# Altium PCB FENCE_MONITOR.PcbDoc (part 1 of 2)
Units mm, origin at the board's own origin, x right, y up, seen from the top; angles counter-clockwise.
Board outline 22.8 x 52 mm, 2 copper layers (Top Layer, Bottom Layer), stack 1.579 mm thick; 78 components, 46 nets, 180 pads, 62 vias.
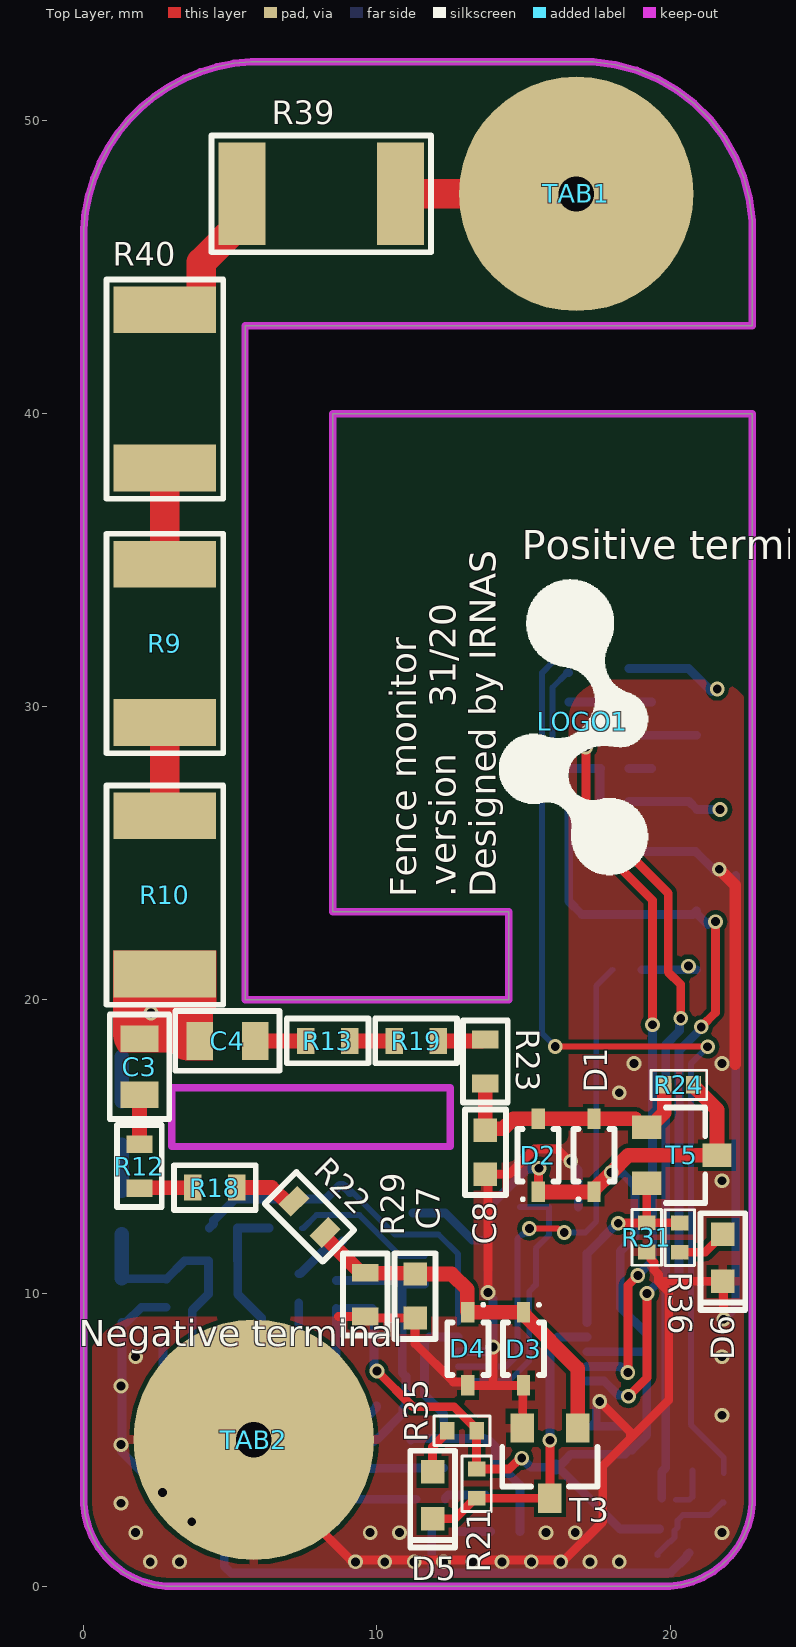
[diagram p0: Top Layer view]
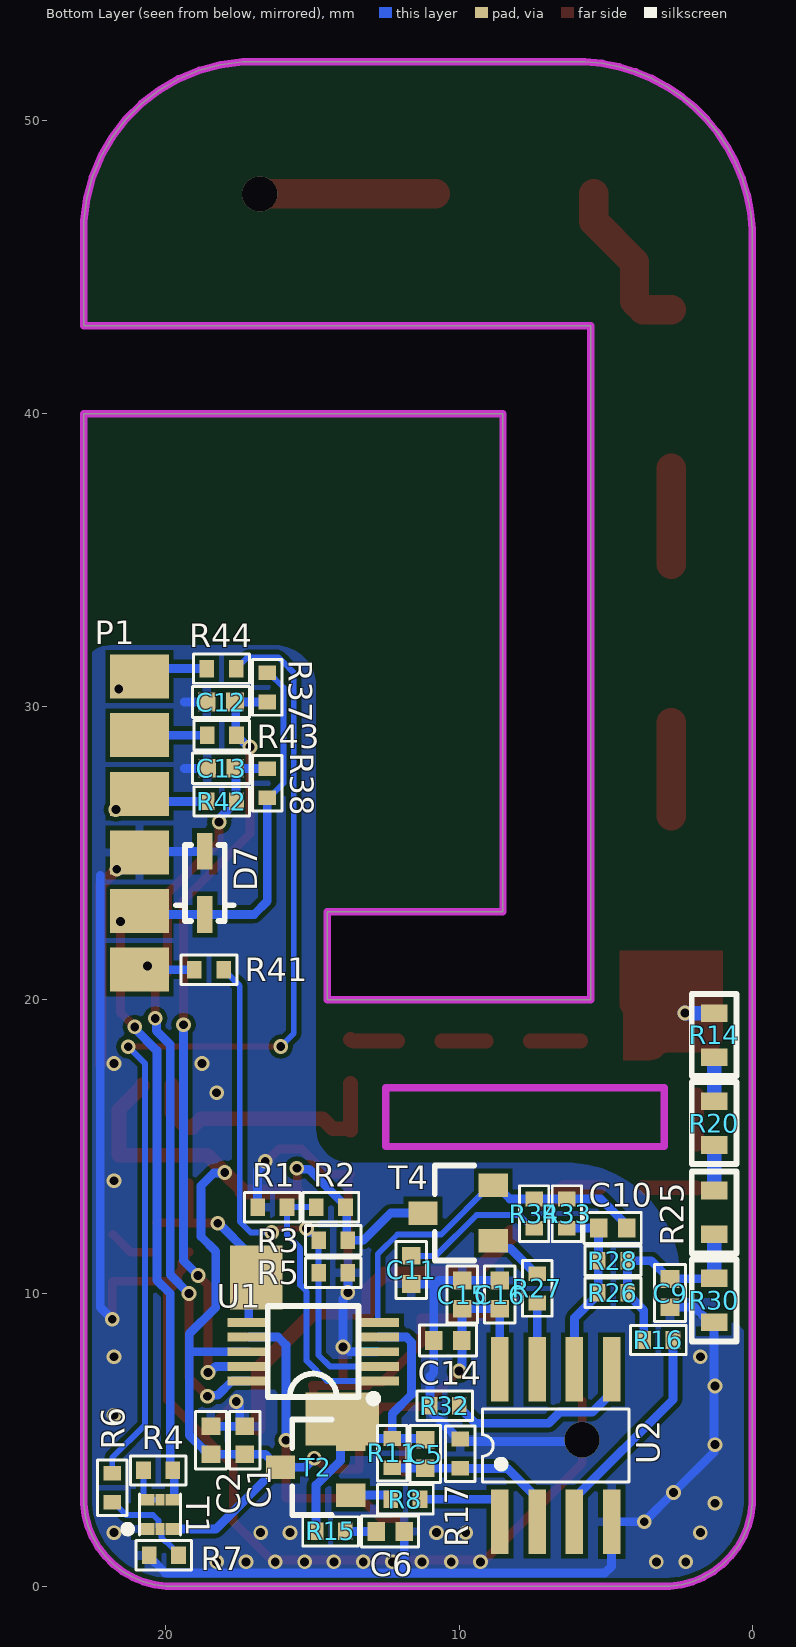
[diagram p1: Bottom Layer view, seen from below]

## Layer stack, top to bottom
Top Solder: solder mask 0.0102, Solder Resist, Dk 3.5
Top Layer: signal copper 0.0356
Dielectric 1: dielectric 1.508, FR-4, Dk 4.8
Bottom Layer: signal copper 0.0356
Bottom Solder: solder mask 0.0102, Solder Resist, Dk 3.5

## Board outline
0.303,1.671 0.153,2.034 0.051,2.414 0,2.804 0,3 0,17.6 0,18.6 0,46 0,46.295 0.058,46.881 0.173,47.459 0.344,48.024 0.569,48.568 0.847,49.088 1.175,49.578 1.549,50.034 1.966,50.451 2.421,50.825 2.912,51.153 3.431,51.43 3.976,51.656 4.54,51.827 5.118,51.942 5.705,52 6,52 17,52 17.38,52 18.134,51.901 18.868,51.704 19.571,51.413 20.229,51.033 20.832,50.57 21.37,50.033 21.832,49.429 22.213,48.771 22.504,48.069 22.7,47.334 22.8,46.581 22.8,43 5.5,43 5.5,20 14.5,20 14.5,23 8.5,23 8.5,40 22.8,40 22.8,30.5 22.8,22.5 22.8,18.6 22.8,17.6 22.8,3.002 22.8,2.805 22.749,2.415 22.647,2.035 22.496,1.671 22.3,1.331 22.06,1.018 21.782,0.74 21.47,0.501 21.129,0.304 20.765,0.153 20.385,0.052 19.995,0 19.799,0 3,0 2.803,0 2.413,0.052 2.033,0.153 1.67,0.304 1.329,0.5 1.017,0.74 0.739,1.018 0.5,1.33

## Design rules (kind name [scope] priority, off if disabled: settings)
Clearance Clearance_ANT [InComponent('A1')] p1 off: gap=2.24 ignorepadtopadclearanceinfootprint=TRUE
Clearance [All] p2: gap=0.152 ignorepadtopadclearanceinfootprint=FALSE
ComponentClearance [All] p1: gap=0.152 collisioncheckmode=3 verticalgap=0.152 showdistances=FALSE
MinimumSolderMaskSliver [All] p1: minsoldermaskwidth=0
PlaneClearance [InComponent('A1')] p1: clearance=0.508
PolygonConnect [All] p1: thpad.connectstyle=Direct thpad.reliefconductorwidth=0.254 thpad.reliefentries=4 thpad.polygonreliefangle="90 Angle" thpad.airgapwidth=0.254 smdpad.connectstyle=Relief smdpad.reliefconductorwidth=0.3 smdpad.reliefentries=4 smdpad.polygonreliefangle="90 Angle" smdpad.airgapwidth=0.157 via.connectstyle=Direct via.reliefconductorwidth=0.254 via.reliefentries=4 via.polygonreliefangle="90 Angle" via.airgapwidth=0.254
RoutingVias [All] p1: holewidth=0.2 width=0.4 viastyle="Through Hole" minholewidth=0.2 minwidth=0.4 maxholewidth=1.5 maxwidth=2
SilkToSilkClearance [All] p1: silktosilkclearance=0
SilkToSolderMaskClearance [IsPad] p1: minsilkscreentomaskgap=0 clearancetoexposedcopper=TRUE
SolderMaskExpansion [All] p1: expansion=0.102 istentingtop=FALSE
Width [All] p1: maxlimit=5 minlimit=0.127 preferedwidth=0.3
25 further rules are at their usual default settings.

## Classes and differential pairs
component class ANALOG: C3 C4 C5 C6 C7 C8 C9 C10 C11 C14 C15 C16 D1 D2 D3 D4 D5 D6 R8 R9 R10 R11 R12 R13 R14 R15 R16 R17 R18 R19 R20 R21 R22 R23 R24 R25 R26 R27 R28 R29 R30 R31 R32 R33 R34 R35 R36 R39 R40 T2 T3 T4 T5 TAB1 TAB2 U2
component class ADC: C1 C2 R1 R2 R3 R4 R5 R6 R7 T1 U1
component class MAIN: C12 C13 D7 LOGO1 P1 R37 R38 R41 R42 R43 R44

## Components (designator, comment, footprint, x,y, rotation, side; value= is the part's Value field where it differs from the comment)
C1 "1uF" CAP0402 17.31,4.98 r270 bottom
C2 "100nF" CAP0402 18.46,4.98 r270 bottom
C3 "1nF" CAP0805 1.9,17.72 r90 top
C4 "1nF" CAP0805 4.9,18.6 r180 top
C5 "1pF" CAP0402 11.15,4.51 r90 bottom
C6 "100nF" CAP0402 12.35,1.87 r0 bottom
C7 "4.7pF" CAP0603 11.3,9.9 r90 top
C8 "4.7pF" CAP0603 13.7,14.8 r90 top
C9 "1pF" CAP0402 2.8,10 r90 bottom
C10 "1pF" CAP0402 4.76,12.22 r180 bottom
C11 "100nF" CAP0402 11.63,10.79 r90 bottom
C12 "100pF" CAP0402 18.12,30.16 r180 bottom
C13 "100pF" CAP0402 18.11,27.9 r180 bottom
C14 "1nF" CAP0402 10.38,8.38 r180 bottom
C15 "10nF" CAP0402 9.89,9.95 r270 bottom
C16 "100nF" CAP0402 8.61,9.95 r270 bottom
D1 "BAT54HT1G" "SOD-323 2L" 17.4,14.7 r90 top
D2 "BAT54HT1G" "SOD-323 2L" 15.5,14.7 r90 top
D3 "BAT54HT1G" "SOD-323 2L" 15,8.1 r270 top
D4 "BAT54HT1G" "SOD-323 2L" 13.1,8.1 r270 top
D5 "LED RED" LED0603 11.9,3.1 r90 top
D6 "LED RED" LED0603 21.8,11.2 r90 top
D7 "uClamp3301D" SOD-323 18.67,23.99 r0 bottom
LOGO1 "IRNAS logo1-10mm" LOGO_1-10MM 17,29.5 r90 top
P1 "IRNAS - LION_EXTENSION" IRNAL_LION_ADDON 20.9,26.03 r90 bottom locked
R1 "0R" RES0402 16.37,12.93 r0 bottom
R2 "0R" RES0402 14.37,12.93 r180 bottom
R3 "100k" RES0402 14.29,11.8 r180 bottom
R4 "100k" RES0402 20.26,3.95 r180 bottom
R5 "100k" RES0402 14.29,10.69 r0 bottom
R6 "100R" RES0402 21.83,3.36 r270 bottom
R7 "1M/0402" RES0402 20.07,1.059 r180 bottom
R8 "10R" RES0402 11.83,2.97 r0 bottom
R9 "1M" RES2512 2.762,32.16 r270 top
R10 "1M" RES2512 2.762,23.58 r270 top
R11 "47k" RES0402 12.28,4.54 r270 bottom
R12 "100k" RES0603 1.9,14.33 r90 top
R13 "100k" RES0603 8.32,18.6 r180 top
R14 "11k?" RES0603 1.3,18.8 r90 bottom
R15 "2R2" RES0402 14.38,1.87 r0 bottom
R16 "22k" RES0402 3.2,8.4 r180 bottom
R17 "47k" RES0402 9.96,4.52 r270 bottom
R18 "100k" RES0603 4.47,13.6 r180 top
R19 "100k" RES0603 11.34,18.6 r180 top
R20 "11k?" RES0603 1.3,15.8 r90 bottom
R21 "100k" RES0402 13.4,3.5 r90 top
R22 "100k" RES0603 7.7,12.6 r135 top
R23 "100k" RES0603 13.7,17.9 r90 top
R24 "220k" RES0402 20.3,17.1 r0 top
R25 "11k?" RES0603 1.3,12.75 r90 bottom
R26 "47k" RES0402 4.75,10.01 r180 bottom
R27 "10R" RES0402 7.33,10.16 r90 bottom
R28 "47k" RES0402 4.75,11.1 r180 bottom
R29 "220k" RES0603 9.6,9.95 r90 top
R30 "150R" RES0603 1.3,9.75 r90 bottom
R31 "100k" RES0402 19.2,11.9 r90 top
R32 "22k" RES0402 10.49,6.16 r180 bottom
R33 "47k" RES0402 6.32,12.71 r270 bottom
R34 "2R2" RES0402 7.44,12.71 r90 bottom
R35 "100R" RES0402 12.9,5.3 r0 top
R36 "100R" RES0402 20.329,11.891 r90 top
R37 "4k7" RES0402 16.54,30.66 r90 bottom
R38 "4k7" RES0402 16.54,27.39 r270 bottom
R39 "1M" RES2512 8.1,47.5 r180 top
R40 "1M" RES2512 2.762,40.84 r270 top
R41 "100R" RES0402 18.53,21.03 r180 bottom
R42 "47R" RES0402 18.09,26.77 r180 bottom
R43 "47R" RES0402 18.09,29.03 r180 bottom
R44 "100R" RES0402 18.1,31.3 r180 bottom
T1 "VT6M1T2CR" VMT6 20.2,2.45 r180 bottom value=BSS123
T2 "BC847B" "SOT 23" 14.89,4.06 r90 bottom value=BSS123
T3 "BC847B" "SOT 23" 15.9,4.2 r180 top value=BSS123
T4 "BC847B" "SOT 23" 10.03,12.73 r90 bottom value=BSS123
T5 "BC847B" "SOT 23" 20.4,14.7 r270 top value=BSS123
TAB1 "WP-SMBU SMD" WP-SMBU#1 16.8,47.49 r180 top
TAB2 "WP-SMBU SMD" WP-SMBU#2 5.8,5 r180 top
U1 "ADS1015IDGST" VSSOP-10 14.97,8 r90 bottom
U2 "TLV9052IDR" "SOIC-8 REFLOW" 6.7,4.8 r180 bottom

## Footprints (in the part's own frame and the unit in brackets; to place one, negate y for a bottom-side part, rotate by r counter-clockwise, add the part's x,y. Pads: shape width x height; smd on the part's side, far side on the other; paste and mask are expansions set on the pad)
CAP0402 [mm] "Chip Capacitor, 2-Leads, Body 1.00x0.50mm, IPC Medium Density"
  rect 0.6x0.64 smd: 1(-0.48,0) 2(0.48,0)
  silkscreen extent -0.97,-0.53 0.97,0.53, body extent -0.55,-0.3 0.55,0.3, height 0.45
CAP0603 [mm]
  rect 0.8x0.8 smd: 1(-0.75,0) 2(0.75,0)
  silkscreen extent -1.46,-0.7 1.46,0.7, body extent -0.8,-0.4 0.8,0.4, height 0.9
CAP0805 [mm]
  rect 0.9x1.3 smd: 1(-0.95,0) 2(0.95,0)
  silkscreen extent -1.78,-1.02 1.78,1.02, body extent -1,-0.6 1,0.6, height 1.5
IRNAL_LION_ADDON [mm]
  rect 1.5x2 smd: 1(-5,0) 2(-3,0) 3(-1,0) 4(1,0) 5(3,0) 6(5,0)
LED0603 [mm]
  rect 0.8x0.8 smd: 1(-0.8,0) 2(0.8,0)
  silkscreen extent -1.78,-0.76 1.52,0.76, body extent -0.85,-0.4 0.85,0.4, height 0.66
LOGO_1-10MM [mm]
  silkscreen extent -5.24,-2.25 4.85,2.83
RES0402 [mm] "Chip Resistor, 2-Leads, Body 1.00x0.50mm, IPC Medium Density"
  rect 0.5x0.6 smd: 1(-0.5,0) 2(0.5,0)
  silkscreen extent -0.95,-0.5 0.95,0.5, body extent -0.5,-0.25 0.5,0.25, height 0.35
RES0603 [mm]
  rect 0.6x0.9 smd: 1(-0.75,0) 2(0.75,0)
  silkscreen extent -1.4,-0.76 1.4,0.76, body extent -0.8,-0.42 0.8,0.42, height 0.8
RES2512 [mm]
  rect 1.6x3.5 smd: 1(-2.7,0) 2(2.7,0)
  silkscreen extent -3.74,-1.99 3.74,2, body extent -3.18,-1.63 3.18,1.63, height 0.58
SOD-323 [mm]
  rect 0.53x1.25 smd: A(0,-1.075) K(0,1.075)
  silkscreen extent -0.98,-1.3 0.98,1.3, body extent -0.68,-1.3 0.67,1.3, height 1.1
"SOD-323 2L" [mm]
  rect 0.7x0.45 smd: 1(-1.25,0) 2(1.25,0)
  silkscreen extent -1.55,-0.7 0.9,0.7, body extent -1.1,-0.67 1.1,0.68, height 1.1
"SOIC-8 REFLOW" [mm] "5 X 6,2 X 1,75; P1,27"
  rect 0.6x2.2 smd: 1(-1.905,-2.6) 2(-0.635,-2.6) 3(0.635,-2.6) 4(1.905,-2.6) 5(1.905,2.6) 6(0.635,2.6) 7(-0.635,2.6) 8(-1.905,2.6)
  silkscreen extent -2.5,-1.25 2.5,1.25, body extent -2.45,-2.94 2.45,3.05, height 1.6
"SOT 23" [mm]
  rect 0.8x1 smd: 1(-0.95,-1.2) 2(0.95,-1.2) 3(0,1.2)
  silkscreen extent -1.63,-0.55 1.63,0.8, body extent -1.5,-1.25 1.5,1.25, height 1.05
VMT6 [mm]
  rect 0.5x0.4 smd mask+0.05: 1(-0.43,-0.5) 3(0.43,-0.5) 4(0.43,0.5) 6(-0.43,0.5)
  rect 0.3x0.4 smd mask+0.05: 2(0,-0.5) 5(0,0.5)
  silkscreen extent -1.22,-0.7 0.7,0.7, body extent -0.6,-0.6 0.6,0.6, height 0.55
VSSOP-10 [mm]
  rect 0.3x1.45 smd mask+0.05: 1(-1,-2.2) 2(-0.5,-2.2) 3(0,-2.2) 4(0.5,-2.2) 5(1,-2.2) 6(1,2.2) 7(0.5,2.2) 8(0,2.2) 9(-0.5,2.2) 10(-1,2.2)
  silkscreen extent -1.71,-2.16 1.56,1.55, body extent -1.49,-2.46 1.51,2.47, height 1.1
WP-SMBU#1 [mm]
  round 8 smd paste-10: 1(0,0)
  body extent -3.5,-3.5 3.5,3.5, height 7
WP-SMBU#2 [mm]
  round 8.2 smd paste-10: 1(0,0)
  body extent -3.5,-3.5 3.5,3.5, height 7

## Part data
C1: library part "C - 1uF/0402", "CAP CER 1UF 10V 20% X5R 0402", Case Code (Imperial)=0402, Case Code (Metric)=1005, Dielectric=X5R, IRNAS Part No.=/, Manufacturer=Murata, Manufacturer Part Number=GRM155R61A105ME15D, Max Operating Temperature=85°C, Min Operating Temperature=-55°C, Package Quantity=1, Supplier Part Number 1=2426953, Tolerance=20%, Voltage=10V, Capacitance=1uF, Case/Package=0402, ComponentLink1Description=https://datasheet.ciiva.com/164/product-164665.pdf, ComponentLink1URL=https://datasheet.ciiva.com/164/product-164665.pdf, ComponentLink2Description=https://datasheet.ciiva.com/11616/product-11616508.pdf, ComponentLink2URL=https://datasheet.ciiva.com/11616/product-11616508.pdf, ComponentLink3Description=https://datasheet.ciiva.com/46418/1769893-46418047.pdf, ComponentLink3URL=https://datasheet.ciiva.com/46418/1769893-46418047.pdf, ComponentLink4Description=https://datasheet.ciiva.com/164/partnumbering-e-01-164666.pdf, ComponentLink4URL=https://datasheet.ciiva.com/164/partnumbering-e-01-164666.pdf, ComponentLink5Description=https://datasheet.ciiva.com/164/partnumbering-e-01-164667.pdf, ComponentLink5URL=https://datasheet.ciiva.com/164/partnumbering-e-01-164667.pdf, Depth=0.5mm, Height=0.5mm, Lead Free="Lead Free", Length=1mm, Mount="Surface Mount", Packaging="Tape and Reel", Pricing 1="10=0.0379, 100=0.0266, 500=0.0156, 2500=0.0098, 5000=0.0083 (EUR)", Radiation Hardening=No, REACH SVHC="No SVHC", Stock 1=0, Supplier 1=Farnell, Thickness=0.022inch, Voltage Rating=10V, Voltage Rating (DC)=10V, Width=0.02inch
C2 C6 C11 C16: library part "C - 100nF/0402", "MULTICOMP         MC0402X104J160CT             SMD Multilayer Ceramic Capacitor, 0402 [1005 Metric], 0.1 F, 16 V,  5%, X5R, MC Series                          New", Case Code (Imperial)=0402, Case Code (Metric)=1005, Dielectric=X5R, IRNAS Part No.=/, Manufacturer=Multicomp, Manufacturer Part Number=MC0402X104J160CT, Max Operating Temperature=85°C, Min Operating Temperature=-55°C, Supplier Part Number 1=2627419, Tolerance=5%, Voltage Rating=16V, Capacitance=100nF, ComponentLink1Description=http://www.farnell.com/datasheets/2117933.pdf, ComponentLink1URL=http://www.farnell.com/datasheets/2117933.pdf, ComponentLink2Description=http://www.farnell.com/datasheets/2117900.pdf, ComponentLink2URL=http://www.farnell.com/datasheets/2117900.pdf, Packaging="Tape and Reel", Pricing 1="10=0.0139, 100=0.0108, 500=0.0076, 2500=0.0051, 5000=0.0038 (EUR)", REACH SVHC="No SVHC", Stock 1=3230, Supplier 1=Farnell, Voltage Rating (DC)=16V
C3 C4: library part "C - 2.2uF/0805", "Multilayer Ceramic Capacitors MLCC - SMD/SMT 2.2uF 25V X7R 10%", Capacitance=2.2uF, Case Code (Imperial)=0805, Case Code (Metric)=2012, Dielectric=X7R, IRNAS Part No.=/, Manufacturer=Yageo, Manufacturer Part Number=CC0805KKX7R8BB225, Max Operating Temperature=125°C, Min Operating Temperature=-55°C, Supplier Part Number 1=1458904, Tolerance=10%, Voltage Rating=25V, Case/Package=0805, ComponentLink1Description=https://datasheet.ciiva.com/7009/775840-7009706.pdf, ComponentLink1URL=https://datasheet.ciiva.com/7009/775840-7009706.pdf, Composition=Ceramic, Depth=1.25mm, Halogen Free="Halogen Free", Height=0.3mm, Lead Free="Lead Free", Length=2mm, Mount="Surface Mount", Number of Pins=2, Packaging="Tape and Reel", Pricing 1="5=0.269, 50=0.163, 250=0.109, 500=0.0929, 1500=0.0722, 3000=0.0594, 15000=0.05 (GBP)", Radiation Hardening=No, REACH SVHC=Unknown, Stock 1=0, Supplier 1=Farnell, Termination=SMD/SMT, Thickness=0.057inch, Voltage Rating (DC)=25V, Width=1.25mm
C5 C9 C10: library part "C - 1pF/0402", "Multilayer Ceramic Capacitors MLCC - SMD/SMT 50volts 1.8pF C0G", Capacitance=1.8pF, Case Code (Imperial)=0402, Case Code (Metric)=1005, Dielectric Material=Ceramic, IRNAS Part No.=/, Manufacturer=KEMET, Manufacturer Part Number=C0402C189B5GACTU, Max Operating Temperature=125°C, Min Operating Temperature=-55°C, Supplier Part Number 1=2533789, Voltage Rating=50V, Case/Package=0402, ComponentLink1Description=https://datasheet.ciiva.com/5413/kem-c1003-c0g-smd-5413366.pdf, ComponentLink1URL=https://datasheet.ciiva.com/5413/kem-c1003-c0g-smd-5413366.pdf, Lead Free="Lead Free", Packaging="Tape and Reel", Pricing 1="10=0.463, 100=0.248, 500=0.182, 2500=0.153, 5000=0.134, 10000=0.11, 50000=0.0961 (EUR)", Stock 1=8950, Supplier 1=Farnell, Termination=SMD/SMT, Voltage Rating (DC)=50V
C7 C8: library part "C - 4u7  16V 0603", "MURATA - GRM188R61C475KAAJD - CAP, MLCC, X5R, 4.7UF, 16V, 0603", Capacitance=4.7, Capacitance Tolerance="± 10%", Ceramic Capacitor Case="0603 [1608 Metric]", Dielectric Characteristic=X5, IRNAS Part No.=I-200001, Manufacturer=MURATA, Manufacturer Part Number=GRM188R61C475KAAJD, Operating Temperature Max=85, Operating Temperature Min=-55, Supplier Part Number 1=2611924, Voltage Rating=16, Automotive Qualification Standard=-, ComponentLink1Description=http://www.farnell.com/datasheets/2079168.pdf, ComponentLink1URL=http://www.farnell.com/datasheets/2079168.pdf, MSL="MSL 1 - Unlimited", Packaging="Cut Tape", Pricing 1="10=0.16, 100=0.0929, 500=0.076, 1000=0.0618, 2000=0.0605, 4000=0.0425, 20000=0.0409, 40000=0.0355 (GBP)", Product Range="GRM Series", RoHS=YES, Stock 1=5038, Supplier 1=Farnell, SVHC="No SVHC (17-Dec-2015)<!--FANDB--><div class=\"features-and-benefits-container\"><div class=\"features-and-benefits-desc-container\"><span class=\"features-and-benefits-container-desc\">SMD Multilayer Ceramic Capacitor, 0603 [1608 Metric], 4.7 µF, 16 V, ± 10%, X5"
C12 C13: library part "C - 100pF/0402", "Cap Ceramic 100pF 50V X7R 10% SMD 0402 125C T/R", Case Code (Imperial)=0402, Case Code (Metric)=1005, Dielectric=X7R, Dielectric Material=Ceramic, IRNAS Part No.=/, Manufacturer=KEMET, Manufacturer Part Number=C0402C101K5RACTU, Max Operating Temperature=125°C, Min Operating Temperature=-55°C, Package Quantity=10000, Supplier Part Number 1=2522375, Tolerance=10%, Voltage Rating=50V, Capacitance=100pF, Case/Package=0402, ComponentLink1Description=http://components.arrow.com/part/dataview/48781706S8928725N7429, ComponentLink1URL=http://components.arrow.com/part/dataview/48781706S8928725N7429, ComponentLink2Description=http://www.farnell.com/datasheets/2112152.pdf, ComponentLink2URL=http://www.farnell.com/datasheets/2112152.pdf, ComponentLink3Description=http://www.mouser.com/ds/2/212/KEM_C1002_X7R_SMD-1102033.pdf, ComponentLink3URL=http://www.mouser.com/ds/2/212/KEM_C1002_X7R_SMD-1102033.pdf, Depth=0.5mm, Length=1mm, Mount="Surface Mount", Packaging="Tape and Reel", Pricing 1="10=0.0252, 100=0.0202, 500=0.0126, 2500=0.0084, 5000=0.0072 (EUR)", REACH SVHC="No SVHC", Stock 1=35279, Supplier 1=Farnell, Termination=SMD/SMT, Thickness=0.02inch, Voltage Rating (DC)=50V, Width=0.5mm
C14: library part "C - 1nF/0402", "CAP CER 1000PF 50V X7R 0402", Case Code (Imperial)=0402, Case Code (Metric)=1005, Dielectric=X7R, IRNAS Part No.=/, Manufacturer=Murata, Manufacturer Part Number=GCM155R71H102KA37D, Max Operating Temperature=125°C, Min Operating Temperature=-55°C, Package Quantity=1, Supplier Part Number 1=2470415, Tolerance=10%, Voltage=50V, Capacitance=1nF, Case/Package=0402, ComponentLink1Description=https://datasheet.ciiva.com/130/product-130720.pdf, ComponentLink1URL=https://datasheet.ciiva.com/130/product-130720.pdf, ComponentLink2Description=https://datasheet.ciiva.com/18183/getdatasheetpartid-140970-18183520.pdf, ComponentLink2URL=https://datasheet.ciiva.com/18183/getdatasheetpartid-140970-18183520.pdf, ComponentLink3Description=https://datasheet.ciiva.com/3778/3103gcm155r71h102ka3723-3778878.pdf, ComponentLink3URL=https://datasheet.ciiva.com/3778/3103gcm155r71h102ka3723-3778878.pdf, ComponentLink4Description=https://datasheet.ciiva.com/11786/0900766b80ef92d0-11786143.pdf, ComponentLink4URL=https://datasheet.ciiva.com/11786/0900766b80ef92d0-11786143.pdf, ComponentLink5Description=https://datasheet.ciiva.com/17453/product-17453655.pdf, ComponentLink5URL=https://datasheet.ciiva.com/17453/product-17453655.pdf, ComponentLink6Description=https://datasheet.ciiva.com/16213/product-16213384.pdf, ComponentLink6URL=https://datasheet.ciiva.com/16213/product-16213384.pdf, Depth=0.5mm, Height=0.5mm, Lead Free="Lead Free", Length=1mm, Mount="Surface Mount", Packaging="Tape and Reel", Radiation Hardening=No, REACH SVHC="No SVHC", Stock 1=0, Supplier 1=Farnell, Termination=SMD/SMT, Thickness=0.022inch, Voltage Rating=50V, Voltage Rating (DC)=50V, Width=0.02inch
C15: library part "C - 10nF/0402", "CAP CER 10000PF 16V X7R 0402", Case Code (Imperial)=0402, Case Code (Metric)=1005, Dielectric=X7R, IRNAS Part No.=/, Manufacturer=Murata, Manufacturer Part Number=GRM155R71C103KA01D, Max Operating Temperature=125°C, Min Operating Temperature=-55°C, Package Quantity=1, Supplier Part Number 1=1828864, Tolerance=10%, Voltage=16V, Capacitance=10nF, Case/Package=0402, ComponentLink1Description=https://datasheet.ciiva.com/129/partnumbering-e-01-129774.pdf, ComponentLink1URL=https://datasheet.ciiva.com/129/partnumbering-e-01-129774.pdf, ComponentLink2Description=https://datasheet.ciiva.com/129/partnumbering-e-01-129775.pdf, ComponentLink2URL=https://datasheet.ciiva.com/129/partnumbering-e-01-129775.pdf, ComponentLink3Description=https://datasheet.ciiva.com/129/product-129776.pdf, ComponentLink3URL=https://datasheet.ciiva.com/129/product-129776.pdf, ComponentLink4Description=https://datasheet.ciiva.com/18184/getdatasheetpartid-178863-18184649.pdf, ComponentLink4URL=https://datasheet.ciiva.com/18184/getdatasheetpartid-178863-18184649.pdf, ComponentLink5Description=https://datasheet.ciiva.com/22698/608985-22698415.pdf, ComponentLink5URL=https://datasheet.ciiva.com/22698/608985-22698415.pdf, ComponentLink6Description=https://datasheet.ciiva.com/7937/608985-7937614.pdf, ComponentLink6URL=https://datasheet.ciiva.com/7937/608985-7937614.pdf, Depth=0.5mm, Height=0.5mm, Lead Free="Lead Free", Length=1mm, Mount="Surface Mount", Number of Pins=2, Packaging="Tape and Reel", Pricing 1="10=0.0216, 100=0.0151, 500=0.0104, 2500=0.0069, 5000=0.0056 (EUR)", Radiation Hardening=No, REACH SVHC="No SVHC", Stock 1=16478, Supplier 1=Farnell, Termination=SMD/SMT, Thickness=0.022inch, Voltage Rating=16V, Voltage Rating (DC)=16V, Width=0.02inch
D1 D2 D3 D4: library part "DS - BAT54HT1G", "FAIRCHILD SEMICONDUCTOR - BAT54HT1G - DIODE, SCHOTTKY, 30V, SOD-323", Diode Case Style=SOD-323, Forward Current If(AV)=200, Forward Surge Current Ifsm Max=600, Forward Voltage VF Max=800, Manufacturer="FAIRCHILD SEMICONDUCTOR", Operating Temperature Max=150, Repetitive Reverse Voltage Vrrm Max=30, Supplier Part Number 1=2453769, Automotive Qualification Standard=-, ComponentLink1Description=http://www.farnell.com/datasheets/2251626.pdf, ComponentLink1URL=http://www.farnell.com/datasheets/2251626.pdf, Diode Configuration=Single, Manufacturer Part Number=BAT54HT1G, MSL="MSL 1 - Unlimited", No. of Pins=2, Packaging="Cut Tape", Pricing 1="1=0.0747, 250=0.065, 500=0.055, 1000=0.045, 3000=0.0349, 9000=0.0279 (GBP)", Product Range="BAT54 Series", Reverse Recovery Time trr Max="5ns<!--FANDB--><div class=\"features-and-benefits-container\"><div class=\"features-and-benefits-description\"><span class=\"features-benefits-value\">The BAT54HT1G is a Schottky Barrier Diode for general usage and suitable for many different applications.</span></div><div class=\"features-and-benefits-list\"><ul class=\"features-and-benefits-list-list\"><li class=\"features-and-benefits-list-item\">-65 to 150°C Storage temperature range</li><li class=\"features-and-benefits-list-item\">-55 to 150", RoHS=YES, Stock 1=5495, Supplier 1=Farnell, SVHC="No SVHC (15-Jun-2015)"
D5 D6: library part "LED - LED RED", "BROADCOM LIMITED - HSMS-C190 - LED, RED, 10MCD, 626NM", Forward Current If=20, Forward Voltage=2.1, LED Colour=Red, Manufacturer="BROADCOM LIMITED", Manufacturer Part Number=HSMS-C190, Supplier Part Number 1=2497356, Automotive Qualification Standard=-, Bulb Size=-, ComponentLink1Description=http://www.farnell.com/datasheets/313031.pdf, ComponentLink1URL=http://www.farnell.com/datasheets/313031.pdf, ComponentLink2Description=http://www.farnell.com/datasheets/1681524.pdf, ComponentLink2URL=http://www.farnell.com/datasheets/1681524.pdf, ComponentLink3Description=http://www.farnell.com/datasheets/2165483.pdf, ComponentLink3URL=http://www.farnell.com/datasheets/2165483.pdf, LED Mounting=SMD, Lens Shape=Rectangular, Luminous Intensity=10, MSL=-, Packaging="Cut Tape", Pricing 1="1=0.361, 10=0.256, 50=0.235, 100=0.106, 200=0.101 (GBP)", Product Range=-, RoHS=YES, Stock 1=7534, Supplier 1=Farnell, SVHC="No SVHC (17-Dec-2015)<!--FANDB--><div class=\"features-and-benefits-container\"><div class=\"features-and-benefits-description\"><span class=\"features-benefits-value\">The HSMS-C190 is a HER SMD Chip LED with untinted/diffused lens, made of GaP. It is designed in an industry standard package 1.6 x 0.8mm footprint with 0.8mm profile. It is compatible with IR reflow solder processes. The small size and wide viewing angle make this LED prime choices for backlighting applications and front panel illumination especially where space is a premium.</span></div><div class=\"features-and-benefits-list\"><ul class=\"features-and-benefits-list-list\"><li class=\"features-and-benefits-list-item\">Small size</li><li class=\"features-and-benefits-list-item\">Industry standard footprint</li><li class=\"features-and-benefits-list-item\">Compatible with IR solder</li><li class=\"features-and-benefits-list-item\">Diffused optics</li><li class=\"features-and-benefits-list-item\">-40 to 85", Viewing Angle=170°, Wavelength Typ=626
D7: library part "D_TVS - uClamp3301D", "TVS Diode, µClamp Series, Unidirectional, 3.3 V, 9.5 V", Diode Case Style=SOD-123, Forward Current If(AV)=300, Forward Surge Current Ifsm Max=2, Forward Voltage VF Max=1.25, Manufacturer="DIODES INC.", Manufacturer Part Number=1N4148W-7-F., Operating Temperature Max=150, Operating Temperature Min=-65, Operating Temperature Range="-65°C to +150°C<!--FANDB--><div class=\"features-and-benefits-container\"><div class=\"features-and-benefits-description\"><span class=\"features-benefits-value\">The 1N4148W-7-F is a surface mount fast Switching Diode with moulded plastic case. Suitable for general purpose switching applications.</span></div><div class=\"features-and-benefits-list\"><ul class=\"features-and-benefits-list-list\"><li class=\"features-and-benefits-list-item\">Fast Switching Speed</li><li class=\"features-and-benefits-list-item\">2", Repetitive Reverse Voltage Vrrm Max=100, Supplier Part Number 1=1456422, Automotive Qualification Standard=-, ComponentLink1Description=Datasheet, ComponentLink1URL=https://semtech.my.salesforce.com/sfc/p/#E0000000JelG/a/44000000MCod/Fs.eSBQs1U.304Nkc5rxRZ3Lk6_1A4.ZX_npjU1R.C8, Diode Configuration=Single, Diode Type=Switching, MSL="MSL 1 - Unlimited", No. of Pins=2, Packaging="Cut Tape", Pricing 1="1=0.136, 25=0.132, 100=0.0465, 500=0.042, 1000=0.024, 3000=0.021, 9000=0.017, 30000=0.0149 (GBP)", Product Range="1N4148 Series", Reverse Recovery Time trr Max=4, RoHS=YES, Stock 1=157320, Supplier 1=Farnell, SVHC="No SVHC (17-Dec-2015)"
P1: "LION_EXTENSION", ComponentLink1Description=Manufacturer, ComponentLink1URL=http://www.we-online.de, ComponentLink2Description=Datasheet, ComponentLink2URL=http://katalog.we-online.de/em/datasheet/691305130004.pdf
R1 R2: library part "R - 0R/0402", "RESISTOR, 0402, 0R, ANTI SULFURATION", Case Code (Imperial)=0402, Case Code (Metric)=1005, IRNAS Part No.=I-100016, Manufacturer=Multicomp, Manufacturer Part Number=MCMR04X000PTL, Power Rating=62.5mW, Resistance=0mR, Supplier Part Number 1=2072513, Temperature Coefficient=400ppm/°C, Voltage Rating=50V, Case/Package=0402, ComponentLink1Description=https://datasheet.ciiva.com/7776/1716705-7776974.pdf, ComponentLink1URL=https://datasheet.ciiva.com/7776/1716705-7776974.pdf, ComponentLink2Description=https://datasheet.ciiva.com/28677/1716705-28677161.pdf, ComponentLink2URL=https://datasheet.ciiva.com/28677/1716705-28677161.pdf, Composition=Ceramic, Packaging="Cut Tape", Pricing 1="10=0.0057, 100=0.0034, 500=0.0024, 2500=0.0019, 5000=0.0015 (EUR)", REACH SVHC="No SVHC", Stock 1=0, Supplier 1=Farnell, Voltage Rating (DC)=50V
R3 R5 R21 R31: library part "R - 100k/0402", "MULTICOMP   MCWR04X1003FTL   RES, THICK FILM, 100KOHM, 1%, 0.0625W", Case Code (Imperial)=0402, Case Code (Metric)=1005, IRNAS Part No.=I-100013, Manufacturer=Multicomp, Manufacturer Part Number=MCWR04X1003FTL, Power Rating=62.5mW, Resistance=100kR, Supplier Part Number 1=2447094, Temperature Coefficient=100ppm/°C, Tolerance=1%, Voltage Rating=50V, Case/Package=0402, ComponentLink1Description=https://datasheet.ciiva.com/46386/1849611-46386524.pdf, ComponentLink1URL=https://datasheet.ciiva.com/46386/1849611-46386524.pdf, Composition="Thick Film", Mount="Surface Mount", Packaging="Cut Tape", Pricing 1="10=0.0029, 100=0.0017, 500=0.0012, 2500=0.001, 5000=0.0008 (EUR)", REACH SVHC="No SVHC", Stock 1=161188, Supplier 1=Farnell, Voltage Rating (DC)=50V
R4: library part "R - 100k/0402", "100KOHM, 1%, 0.0625W", Case Code (Imperial)=0402, Case Code (Metric)=1005, IRNAS Part No.=I-100013, Manufacturer=Multicomp, Manufacturer Part Number=MCWR04X1003FTL, Power Rating=62.5mW, Resistance=100kR, Supplier Part Number 1=2447094, Temperature Coefficient=100ppm/°C, Tolerance=1%, Voltage Rating=50V, Case/Package=0402, ComponentLink1Description=https://datasheet.ciiva.com/46386/1849611-46386524.pdf, ComponentLink1URL=https://datasheet.ciiva.com/46386/1849611-46386524.pdf, Composition="Thick Film", Mount="Surface Mount", Packaging="Cut Tape", Pricing 1="10=0.0029, 100=0.0017, 500=0.0012, 2500=0.001, 5000=0.0008 (EUR)", REACH SVHC="No SVHC", Stock 1=161188, Supplier 1=Farnell, Voltage Rating (DC)=50V
R6: library part "R - 100R/0402", "100 ohm, 50 V, 0402 [1005 Metric], 62.5 mW,  1%", Case Code (Imperial)=0402, Case Code (Metric)=1005, IRNAS Part No.=/, Manufacturer=Multicomp, Manufacturer Part Number=MCMR04X1000FTL, Power Rating=62.5mW, Supplier Part Number 1=2072515, Temperature Coefficient=100ppm/°C, Tolerance=1%, Voltage Rating=50V, Case/Package=0402, ComponentLink1Description=https://datasheet.ciiva.com/28692/1716705-28692087.pdf, ComponentLink1URL=https://datasheet.ciiva.com/28692/1716705-28692087.pdf, ComponentLink2Description=https://datasheet.ciiva.com/22708/1716705-22708156.pdf, ComponentLink2URL=https://datasheet.ciiva.com/22708/1716705-22708156.pdf, Composition=Ceramic, Packaging="Cut Tape", Pricing 1="10=0.0071, 100=0.0042, 500=0.003, 2500=0.0024, 5000=0.0019 (GBP)", REACH SVHC="No SVHC", Resistance=100R, Stock 1=62365, Supplier 1=Farnell, Voltage Rating (DC)=50V
R7: library part "R - 1M/0402", "MCMR04X1004FTL RES, 1M, 1%, 0.0625W, 0402, THICK FILM", IRNAS Part No.=I-100012, Manufacturer=MULTICOMP, Manufacturer Part Number=MC0063W060311M, Operating Temperature Max=155, Operating Temperature Min=-55, Operating Temperature Range="-55°C to +155", Power Rating=63, Resistance=1, Resistance Tolerance="± 1%", Resistor Case Style="0603 [1608 Metric]", Resistor Element Material="Thick Film", Resistor Mounting="Surface Mount Device", Supplier Part Number 1=9330410, Temperature Coeff. +=100, Temperature Coefficient="± 100", Tolerance +=1%, Voltage Rating=50, Voltage Rating V DC="50V<!--FANDB--><div class=\"features-and-benefits-container\"><div class=\"features-and-benefits-description\"><span class=\"features-benefits-value\">The Multicomp MC series current sense resistors are thick film chip resistors. The resistance range includes E96 and E24 decade values from 1ohm to 10Mohm.</span></div><div class=\"features-and-benefits-list\"><ul class=\"features-and-benefits-list-list\"><li class=\"features-and-benefits-list-item\">EIA 0402, 0603, 0805, 1206 chip sizes available</li><li class=\"features-and-benefits-list-item\">Small size and low weight</li><li class=\"features-and-benefits-list-item\">Suitable for both wave and reflow soldering</li><li class=\"features-and-benefits-list-item\">Reduction of assembly costs</li><li class=\"features-and-benefits-list-item\">Maximum working voltage of 50V(0402, 0603), 150V(0805), 200V(1206)</li><li class=\"features-and-benefits-list-item\">Available in ±1%, ±2% and ±5% tolerance</li><li class=\"features-and-benefits-list-item\">Power rating of 62.5mW, 100mW and 125mW</li><li class=\"features-and-benefits-list-item\">±400ppm/°C(1ohm to 10ohm), ±200ppm/°C(11ohm to 100ohm), ±100", Automotive Qualification Standard=-, ComponentLink1Description=http://www.farnell.com/datasheets/1788326.pdf, ComponentLink1URL=http://www.farnell.com/datasheets/1788326.pdf, ComponentLink2Description=http://www.farnell.com/cad/1558928.zip, ComponentLink2URL=http://www.farnell.com/cad/1558928.zip, External Depth=0.45, External Length / Height=1.6, External Width=0.8, No. of Pins=2, Packaging="Cut Tape", Pricing 1="10=0.0011, 100=0.001, 500=0.0009, 1000=0.0008, 2500=0.0007 (GBP)", Product Range="MC Series", Reel Quantity=5000, RoHS=Y-EX, Stock 1=333415, Supplier 1=Farnell, SVHC="No SVHC (17-Dec-2015)", Tape Width=8, Temperature Coeff. -=100, Tolerance -=1%
R8 R27: library part "R - 10R/0402", "SMD Chip Resistor, 0402 [1005 Metric], 10 ohm, CRCW e3 Series, 50 V, Thick Film, 63 mW", IRNAS Part No.=I-100010, Manufacturer=VISHAY, Manufacturer Part Number=RCA060310R0FKEA, Power Rating=100, Resistance=10, Resistance Tolerance="± 1%", Resistor Case Style="0603 [1608 Metric]", Resistor Element Material="Thick Film", Supplier Part Number 1=1652742, Temperature Coefficient="± 100", Voltage Rating=75, Automotive Qualification Standard=AEC-Q200, ComponentLink1Description=http://www.farnell.com/datasheets/2111201.pdf, ComponentLink1URL=http://www.farnell.com/datasheets/2111201.pdf, Packaging="Cut Tape", Pricing 1="10=0.0803, 100=0.0386, 500=0.0235, 2500=0.015, 5000=0.0135, 10000=0.0108, 50000=0.0068, 100000=0.0067 (GBP)", Product Range="RCA Series", RoHS=YES, Stock 1=9559, Supplier 1=Farnell, SVHC="No SVHC (17-Dec-2015)<!--FANDB--><div class=\"features-and-benefits-container\"><div class=\"features-and-benefits-description\"><span class=\"features-benefits-value\">The RCA series from Vishay are automotive grade, sulphur resistant thick film rectangular chip resistors. The resistance range includes E24 and E96 decade values from 1ohm to 10Mohm. They provide superior resistance against H2S atmosphere. These resistors have metal glaze on high quality ceramic.</span></div><div class=\"features-and-benefits-list\"><ul class=\"features-and-benefits-list-list\"><li class=\"features-and-benefits-list-item\">Automotive grade AEC-Q200 qualified (rev C)</li><li class=\"features-and-benefits-list-item\">EIA 0402, 0603, 0805, 1206, 1210, 1218, 2010 and 2512 case sizes available</li><li class=\"features-and-benefits-list-item\">Available in ±0.5%, ±1% and ±5% tolerances</li><li class=\"features-and-benefits-list-item\">Jumpers are also available</li><li class=\"features-and-benefits-list-item\">±50ppm/K, ±100ppm/K and ±200ppm/K TCR values</li><li class=\"features-and-benefits-list-item\">Power rating of 0.063W, 0.10W, 0.125W, 0.25W, 0.5W, 0.75W and 1W at 70?C</li><li class=\"features-and-benefits-list-item\">Available in 50V, 75V, 150V, 200V, 400V and 500V limiting voltage options</li><li class=\"features-and-benefits-list-item\">Category temperature range from -55?C to 155?C</li><li class=\"features-and-benefits-list-item\">Stability ?R/R = 1 % for 1000h at 70"
R9 R10 R39 R40: library part "R - 1M/2512", "SMD Chip Resistor, 2512 [6432 Metric], 1 Mohm, CRCW e3 Series, 500 V", IRNAS Part No.=I-100006, Manufacturer=MULTICOMP, Manufacturer Part Number=MC0063W060311M, Operating Temperature Max=155, Operating Temperature Min=-55, Operating Temperature Range="-55°C to +155", Power Rating=63, Resistance=1, Resistance Tolerance="± 1%", Resistor Case Style="0603 [1608 Metric]", Resistor Element Material="Thick Film", Resistor Mounting="Surface Mount Device", Supplier Part Number 1=2395991, Temperature Coeff. +=100, Temperature Coefficient="± 100", Tolerance +=1%, Voltage Rating=50, Voltage Rating V DC="50V<!--FANDB--><div class=\"features-and-benefits-container\"><div class=\"features-and-benefits-description\"><span class=\"features-benefits-value\">The Multicomp MC series current sense resistors are thick film chip resistors. The resistance range includes E96 and E24 decade values from 1ohm to 10Mohm.</span></div><div class=\"features-and-benefits-list\"><ul class=\"features-and-benefits-list-list\"><li class=\"features-and-benefits-list-item\">EIA 0402, 0603, 0805, 1206 chip sizes available</li><li class=\"features-and-benefits-list-item\">Small size and low weight</li><li class=\"features-and-benefits-list-item\">Suitable for both wave and reflow soldering</li><li class=\"features-and-benefits-list-item\">Reduction of assembly costs</li><li class=\"features-and-benefits-list-item\">Maximum working voltage of 50V(0402, 0603), 150V(0805), 200V(1206)</li><li class=\"features-and-benefits-list-item\">Available in ±1%, ±2% and ±5% tolerance</li><li class=\"features-and-benefits-list-item\">Power rating of 62.5mW, 100mW and 125mW</li><li class=\"features-and-benefits-list-item\">±400ppm/°C(1ohm to 10ohm), ±200ppm/°C(11ohm to 100ohm), ±100", Automotive Qualification Standard=-, ComponentLink1Description=http://www.farnell.com/datasheets/1788326.pdf, ComponentLink1URL=http://www.farnell.com/datasheets/1788326.pdf, ComponentLink2Description=http://www.farnell.com/cad/1558928.zip, ComponentLink2URL=http://www.farnell.com/cad/1558928.zip, External Depth=0.45, External Length / Height=1.6, External Width=0.8, No. of Pins=2, Packaging="Cut Tape", Pricing 1="10=0.0011, 100=0.001, 500=0.0009, 1000=0.0008, 2500=0.0007 (GBP)", Product Range="MC Series", Reel Quantity=5000, RoHS=Y-EX, Stock 1=333415, Supplier 1=Farnell, SVHC="No SVHC (17-Dec-2015)", Tape Width=8, Temperature Coeff. -=100, Tolerance -=1%
R11 R17 R26 R28 R33: library part "R - 47k/0402", "MULTICOMP - MCMR06X4702FTL - RES, CERAMIC, 47K, 1%, 0.1W, 0603", IRNAS Part No.=I-100002, Manufacturer=MULTICOMP, Manufacturer Part Number=MCMR06X4702FTL, Power Rating=100, Resistance=47, Resistance Tolerance="± 1%", Resistor Case Style="0603 [1608 Metric]", Resistor Element Material=Ceramic, Supplier Part Number 1=1469719, Temperature Coefficient="± 100", Voltage Rating=75, Automotive Qualification Standard="-<!--FANDB--><div class=\"features-and-benefits-container\"><div class=\"features-and-benefits-description\"><span class=\"features-benefits-value\">The Multicomp MCMR series resistors are automotive grade, anti sulphured thick film chip resistor. The resistance range includes E24 and E96 decade values from 1ohm to 10Mohm. These resistors are constructed on top of a high grade ceramic body.</span></div><div class=\"features-and-benefits-list\"><ul class=\"features-and-benefits-list-list\"><li class=\"features-and-benefits-list-item\">EIA 0402, 0603, 0805, 1206 chip sizes available</li><li class=\"features-and-benefits-list-item\">High reliability and stability</li><li class=\"features-and-benefits-list-item\">Automotive grade AEC-Q200 compliant</li><li class=\"features-and-benefits-list-item\">Complaint with (IEC 60068-1) 55/155/56 climatic category</li><li class=\"features-and-benefits-list-item\">Maximum operation voltage of 50V, 75V, 150V and 200V</li><li class=\"features-and-benefits-list-item\">Power rating of 62.5mW, 100mW, 125mW and 250mW</li><li class=\"features-and-benefits-list-item\">Available in ±1% and ±5% tolerance</li><li class=\"features-and-benefits-list-item\">Temperature coefficient (TCR) of +200ppm/°C, +100ppm/°C and -200ppm/°C to +400ppm/°C</li><li class=\"features-and-benefits-list-item\">Operating temperature range -55°C to 155", ComponentLink1Description=http://www.farnell.com/datasheets/1716707.pdf, ComponentLink1URL=http://www.farnell.com/datasheets/1716707.pdf, Packaging="Cut Tape", Pricing 1="10=0.0115, 100=0.009, 500=0.0064, 1000=0.0051, 2500=0.0042, 5000=0.0032, 25000=0.0021, 50000=0.0017 (GBP)", Product Range="MCMR Series", RoHS=Y-EX, Stock 1=21427, Supplier 1=Farnell
R12 R13 R18 R19 R22 R23: library part "R - 100k", "MULTICOMP - MCMR06X104 JTL - RES, CERAMIC, 100K, 5%, 0.1W, 0603", IRNAS Part No.=I-100007, Manufacturer=MULTICOMP, Manufacturer Part Number="MCMR06X104 JTL", Power Rating=100, Resistance Tolerance="± 5%", Resistor Case Style="0603 [1608 Metric]", Resistor Element Material=Ceramic, Resistor Mounting="Surface Mount Device<!--FANDB--><div class=\"features-and-benefits-container\"><div class=\"features-and-benefits-description\"><span class=\"features-benefits-value\">The Multicomp MCMR series resistors are automotive grade, anti sulphured thick film chip resistor. The resistance range includes E24 and E96 decade values from 1ohm to 10Mohm. These resistors are constructed on top of a high grade ceramic body.</span></div><div class=\"features-and-benefits-list\"><ul class=\"features-and-benefits-list-list\"><li class=\"features-and-benefits-list-item\">EIA 0402, 0603, 0805, 1206 chip sizes available</li><li class=\"features-and-benefits-list-item\">High reliability and stability</li><li class=\"features-and-benefits-list-item\">Automotive grade AEC-Q200 compliant</li><li class=\"features-and-benefits-list-item\">Complaint with (IEC 60068-1) 55/155/56 climatic category</li><li class=\"features-and-benefits-list-item\">Maximum operation voltage of 50V, 75V, 150V and 200V</li><li class=\"features-and-benefits-list-item\">Power rating of 62.5mW, 100mW, 125mW and 250mW</li><li class=\"features-and-benefits-list-item\">Available in ±1% and ±5% tolerance</li><li class=\"features-and-benefits-list-item\">Temperature coefficient (TCR) of +200ppm/°C, +100ppm/°C and -200ppm/°C to +400ppm/°C</li><li class=\"features-and-benefits-list-item\">Operating temperature range -55°C to 155", Supplier Part Number 1=2073357, Temperature Coefficient="± 100", Voltage Rating=75, Automotive Qualification Standard=-, ComponentLink1Description=http://www.farnell.com/datasheets/1716707.pdf, ComponentLink1URL=http://www.farnell.com/datasheets/1716707.pdf, Packaging="Cut Tape", Pricing 1="10=0.0109, 100=0.0085, 500=0.006, 1000=0.0048, 2500=0.004, 5000=0.003, 25000=0.002, 50000=0.0016 (GBP)", Product Range="MCMR Series", Resistance=100, RoHS=Y-EX, Stock 1=187, Supplier 1=Farnell
R14 R20 R25: library part "R - 10k", "MULTICOMP - MCMR06X103 JTL - RES, CERAMIC, 10K, 5%, 0.1W, 0603", IRNAS Part No.=I-100008, Manufacturer=MULTICOMP, Manufacturer Part Number="MCMR06X103 JTL", Power Rating=100, Resistance=10, Resistance Tolerance="± 5%", Resistor Case Style="0603 [1608 Metric]", Resistor Element Material=Ceramic, Supplier Part Number 1=2073356, Temperature Coefficient="± 100", Voltage Rating=75, Automotive Qualification Standard="-<!--FANDB--><div class=\"features-and-benefits-container\"><div class=\"features-and-benefits-description\"><span class=\"features-benefits-value\">The Multicomp MCMR series resistors are automotive grade, anti sulphured thick film chip resistor. The resistance range includes E24 and E96 decade values from 1ohm to 10Mohm. These resistors are constructed on top of a high grade ceramic body.</span></div><div class=\"features-and-benefits-list\"><ul class=\"features-and-benefits-list-list\"><li class=\"features-and-benefits-list-item\">EIA 0402, 0603, 0805, 1206 chip sizes available</li><li class=\"features-and-benefits-list-item\">High reliability and stability</li><li class=\"features-and-benefits-list-item\">Automotive grade AEC-Q200 compliant</li><li class=\"features-and-benefits-list-item\">Complaint with (IEC 60068-1) 55/155/56 climatic category</li><li class=\"features-and-benefits-list-item\">Maximum operation voltage of 50V, 75V, 150V and 200V</li><li class=\"features-and-benefits-list-item\">Power rating of 62.5mW, 100mW, 125mW and 250mW</li><li class=\"features-and-benefits-list-item\">Available in ±1% and ±5% tolerance</li><li class=\"features-and-benefits-list-item\">Temperature coefficient (TCR) of +200ppm/°C, +100ppm/°C and -200ppm/°C to +400ppm/°C</li><li class=\"features-and-benefits-list-item\">Operating temperature range -55°C to 155", ComponentLink1Description=http://www.farnell.com/datasheets/1716707.pdf, ComponentLink1URL=http://www.farnell.com/datasheets/1716707.pdf, Packaging="Cut Tape", Pricing 1="10=0.0087, 100=0.0074, 500=0.0061, 1000=0.0048, 2500=0.0032, 5000=0.0024, 25000=0.0016, 50000=0.0013 (GBP)", Product Range="MCMR Series", RoHS=Y-EX, Stock 1=19791, Supplier 1=Farnell
R15 R34: library part "R - 2R2/0402", "MULTICOMP         MCWR04X2001FTL            Surface Mount Chip Resistor, Thick Film, MCWR Series, 2 kohm, 62.5 mW,  1%, 50 V", Case Code (Imperial)=0402, Case Code (Metric)=1005, IRNAS Part No.=/, Manufacturer=Multicomp, Manufacturer Part Number=MCWR04X2001FTL, Power Rating=62.5mW, Resistance=2kR, Supplier Part Number 1=2072887, Temperature Coefficient=100ppm/°C, Tolerance=1%, Voltage Rating=50V, Case/Package=0402, ComponentLink1Description=https://datasheet.ciiva.com/46443/1849611-46443359.pdf, ComponentLink1URL=https://datasheet.ciiva.com/46443/1849611-46443359.pdf, Composition="Thick Film", Mount="Surface Mount", Packaging="Cut Tape", Pricing 1="10=0.0029, 100=0.0017, 500=0.0012, 2500=0.001, 5000=0.0008 (EUR)", REACH SVHC="No SVHC", Stock 1=18534, Supplier 1=Farnell, Voltage Rating (DC)=50V
R16 R32: library part "R - 22k/0402", "SMD Chip Resistor, 0402 [1005 Metric], 22 kohm, MCWR Series, 50 V", Case Code (Imperial)=0603, Case Code (Metric)=1608, IRNAS Part No.=/, Manufacturer=Panasonic, Manufacturer Part Number=ERJ-3EKF2202V, Max Operating Temperature=155°C, Max Power Dissipation=100mW, Min Operating Temperature=-55°C, Package Quantity=1, Resistance=22kR, Supplier Part Number 1=2447137, Temperature Coefficient=100ppm/°C, Tolerance=1%, Voltage Rating=75V, Case/Package=0603, ComponentLink1Description=https://datasheet.ciiva.com/16770/70260748-16770054.pdf?src-supplier=Allied+Electronics, ComponentLink1URL=https://datasheet.ciiva.com/16770/70260748-16770054.pdf?src-supplier=Allied+Electronics, ComponentLink2Description=https://datasheet.ciiva.com/16788/70260748-16788918.pdf?src-supplier=Allied+Electronics, ComponentLink2URL=https://datasheet.ciiva.com/16788/70260748-16788918.pdf?src-supplier=Allied+Electronics, ComponentLink3Description=https://datasheet.ciiva.com/48531/aoa0000ce2-48531046.pdf?src-supplier=Avnet, ComponentLink3URL=https://datasheet.ciiva.com/48531/aoa0000ce2-48531046.pdf?src-supplier=Avnet, ComponentLink4Description=https://datasheet.ciiva.com/17210/aoa0000ce2-17210952.pdf?src-supplier=Avnet+Europe, ComponentLink4URL=https://datasheet.ciiva.com/17210/aoa0000ce2-17210952.pdf?src-supplier=Avnet+Europe, ComponentLink5Description=https://datasheet.ciiva.com/9116/aoa0000ce2-9116843.pdf?src-supplier=Avnet, ComponentLink5URL=https://datasheet.ciiva.com/9116/aoa0000ce2-9116843.pdf?src-supplier=Avnet, ComponentLink6Description=https://datasheet.ciiva.com/30063/aoa0000ce2-30063691.pdf?src-supplier=Onlinecomponents.com, ComponentLink6URL=https://datasheet.ciiva.com/30063/aoa0000ce2-30063691.pdf?src-supplier=Onlinecomponents.com, ComponentLink7Description=https://datasheet.ciiva.com/15158/getdatasheetpartid-246478-15158839.pdf?src-supplier=Verical, ComponentLink7URL=https://datasheet.ciiva.com/15158/getdatasheetpartid-246478-15158839.pdf?src-supplier=Verical, ComponentLink8Description=https://datasheet.ciiva.com/7802/1678782-7802681.pdf?src-supplier=Element14, ComponentLink8URL=https://datasheet.ciiva.com/7802/1678782-7802681.pdf?src-supplier=Element14, ComponentLink9Description=https://datasheet.ciiva.com/16511/aoa0000ce2-16511658.pdf?src-supplier=Avnet+Asia, ComponentLink9URL=https://datasheet.ciiva.com/16511/aoa0000ce2-16511658.pdf?src-supplier=Avnet+Asia, Composition="Thick Film", Contact Plating=Tin, Depth=0.8mm, Features="Automotive AEC-Q200", Height=0.022inch, Lead Free="Lead Free", Length=1.6mm, Military Standard=Not, Mount="Surface Mount", Number of Pins=2, Number of Terminations=2, Packaging="Tape and Reel", Power Rating=100mW, Pricing 1="1 = 0.10000, 10 = 0.06500, 100 = 0.02640, 1000 = 0.01186, 2500 = 0.01029 (USD)", Radiation Hardening=No, REACH SVHC="No SVHC", RoHS=Yes, Stock 1=1414926, Supplier 1=Farnell, Termination=SMD/SMT, Voltage Rating (DC)=75V, Width=0.8mm
R24: library part "R - 220k/0402", "MULTICOMP  SMD Chip Resistor, 0603 [1608 Metric], 220 kohm, MCWR Series, 50 V, Thick Film, 100 mW", IRNAS Part No.=I-100023, Manufacturer=MULTICOMP, Manufacturer Part Number=MCWR06X2200FTL, Power Rating=100, Resistance=220, Resistance Tolerance="± 1%", Resistor Case Style="0603 [1608 Metric]", Resistor Element Material="Thick Film", Supplier Part Number 1=2447135, Temperature Coefficient="± 100", Voltage Rating=50, Automotive Qualification Standard=-, ComponentLink1Description=http://www.farnell.com/datasheets/1849611.pdf, ComponentLink1URL=http://www.farnell.com/datasheets/1849611.pdf, Packaging="Cut Tape", Pricing 1="10=0.0031, 100=0.0018, 500=0.0013, 1000=0.001, 2500=0.0008 (GBP)", Product Range="MCWR Series", RoHS=Y-EX, Stock 1=124834, Supplier 1=Farnell, SVHC="No SVHC (07-Jul-2017)<!--FANDB--><div class=\"features-and-benefits-container\"><div class=\"features-and-benefits-desc-container\"><span class=\"features-and-benefits-container-desc\">SMD Chip Resistor, Thick Film, 220 ohm, 50 V, 0603 [1608 Metric], 100 mW, ± 1"
R29: library part "R - 220k", "MULTICOMP  SMD Chip Resistor, 0603 [1608 Metric], 220 kohm, MCWR Series, 50 V, Thick Film, 100 mW", IRNAS Part No.=I-100023, Manufacturer=MULTICOMP, Manufacturer Part Number=MCWR06X2200FTL, Power Rating=100, Resistance=220, Resistance Tolerance="± 1%", Resistor Case Style="0603 [1608 Metric]", Resistor Element Material="Thick Film", Supplier Part Number 1=2447298, Temperature Coefficient="± 100", Voltage Rating=50, Automotive Qualification Standard=-, ComponentLink1Description=http://www.farnell.com/datasheets/1849611.pdf, ComponentLink1URL=http://www.farnell.com/datasheets/1849611.pdf, Packaging="Cut Tape", Pricing 1="10=0.0031, 100=0.0018, 500=0.0013, 1000=0.001, 2500=0.0008 (GBP)", Product Range="MCWR Series", RoHS=Y-EX, Stock 1=124834, Supplier 1=Farnell, SVHC="No SVHC (07-Jul-2017)<!--FANDB--><div class=\"features-and-benefits-container\"><div class=\"features-and-benefits-desc-container\"><span class=\"features-and-benefits-container-desc\">SMD Chip Resistor, Thick Film, 220 ohm, 50 V, 0603 [1608 Metric], 100 mW, ± 1"
R30: library part "R - 150R", "SMD Chip Resistor, 0603 [1608 Metric], 150 ohm, MCWR Series, 50 V, Thick Film, 100 mW", Manufacturer=MULTICOMP, Manufacturer Part Number=MCWR06X1503FTL, Power Rating=100, Resistance=150, Resistance Tolerance="± 1%", Resistor Case Style="0603 [1608 Metric]", Resistor Element Material="Thick Film", Supplier Part Number 1=2447255, Temperature Coefficient="± 100", Voltage Rating=50, Automotive Qualification Standard=-, ComponentLink1Description=Datasheet, ComponentLink1URL=http://www.farnell.com/datasheets/2563624.pdf?_ga=2.225398170.1482069815.1565249558-1373726713.1554121096&_gac=1.53691866.1562763802.CjwKCAjwmZbpBRAGEiwADrmVXm8xT8OHDZvJe8qZIQyyGmIuiUD-TEITatw0hIdDkyBwIXXCH7oneRoCl7cQAvD_BwE, Packaging="Cut Tape", Pricing 1="10=0.0033, 100=0.002, 500=0.0014, 1000=0.0011, 2500=0.0009 (GBP)", Product Range="MCWR Series", RoHS=Y-EX, Stock 1=11455, Supplier 1=Farnell, SVHC="No SVHC (07-Jul-2017)<!--FANDB--><div class=\"features-and-benefits-container\"><div class=\"features-and-benefits-desc-container\"><span class=\"features-and-benefits-container-desc\">SMD Chip Resistor, Thick Film, 150 kohm, 50 V, 0603 [1608 Metric], 100 mW, ± 1"